# Altium PCB controller.PcbDoc
Units mm, origin at the board's own origin, x right, y up, seen from the top; angles counter-clockwise.
Board outline 75.64 x 99.01 mm, 2 copper layers (Top Layer, Bottom Layer); 70 components, 47 nets, 261 pads, 94 vias.
Unrouted connection lines stored in the file: 2.
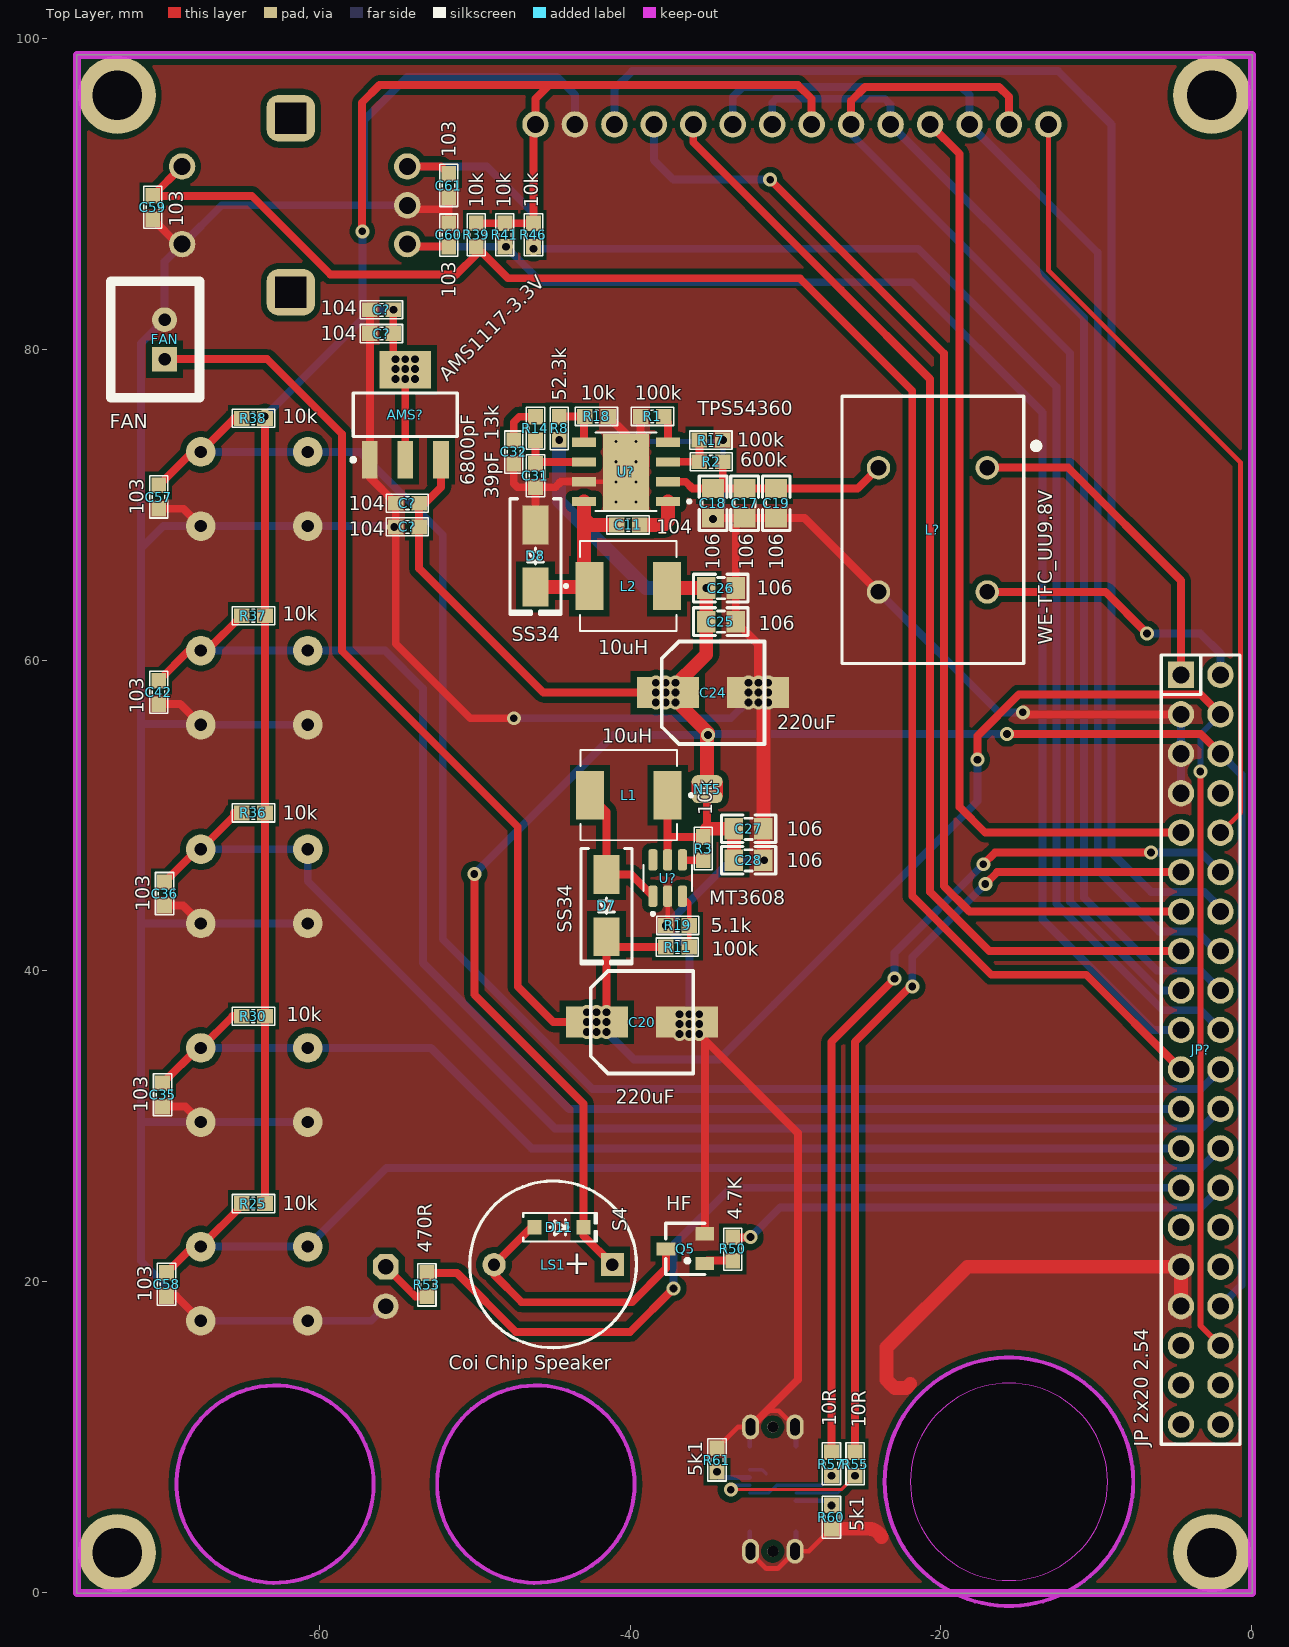
[diagram p0: Top Layer view]
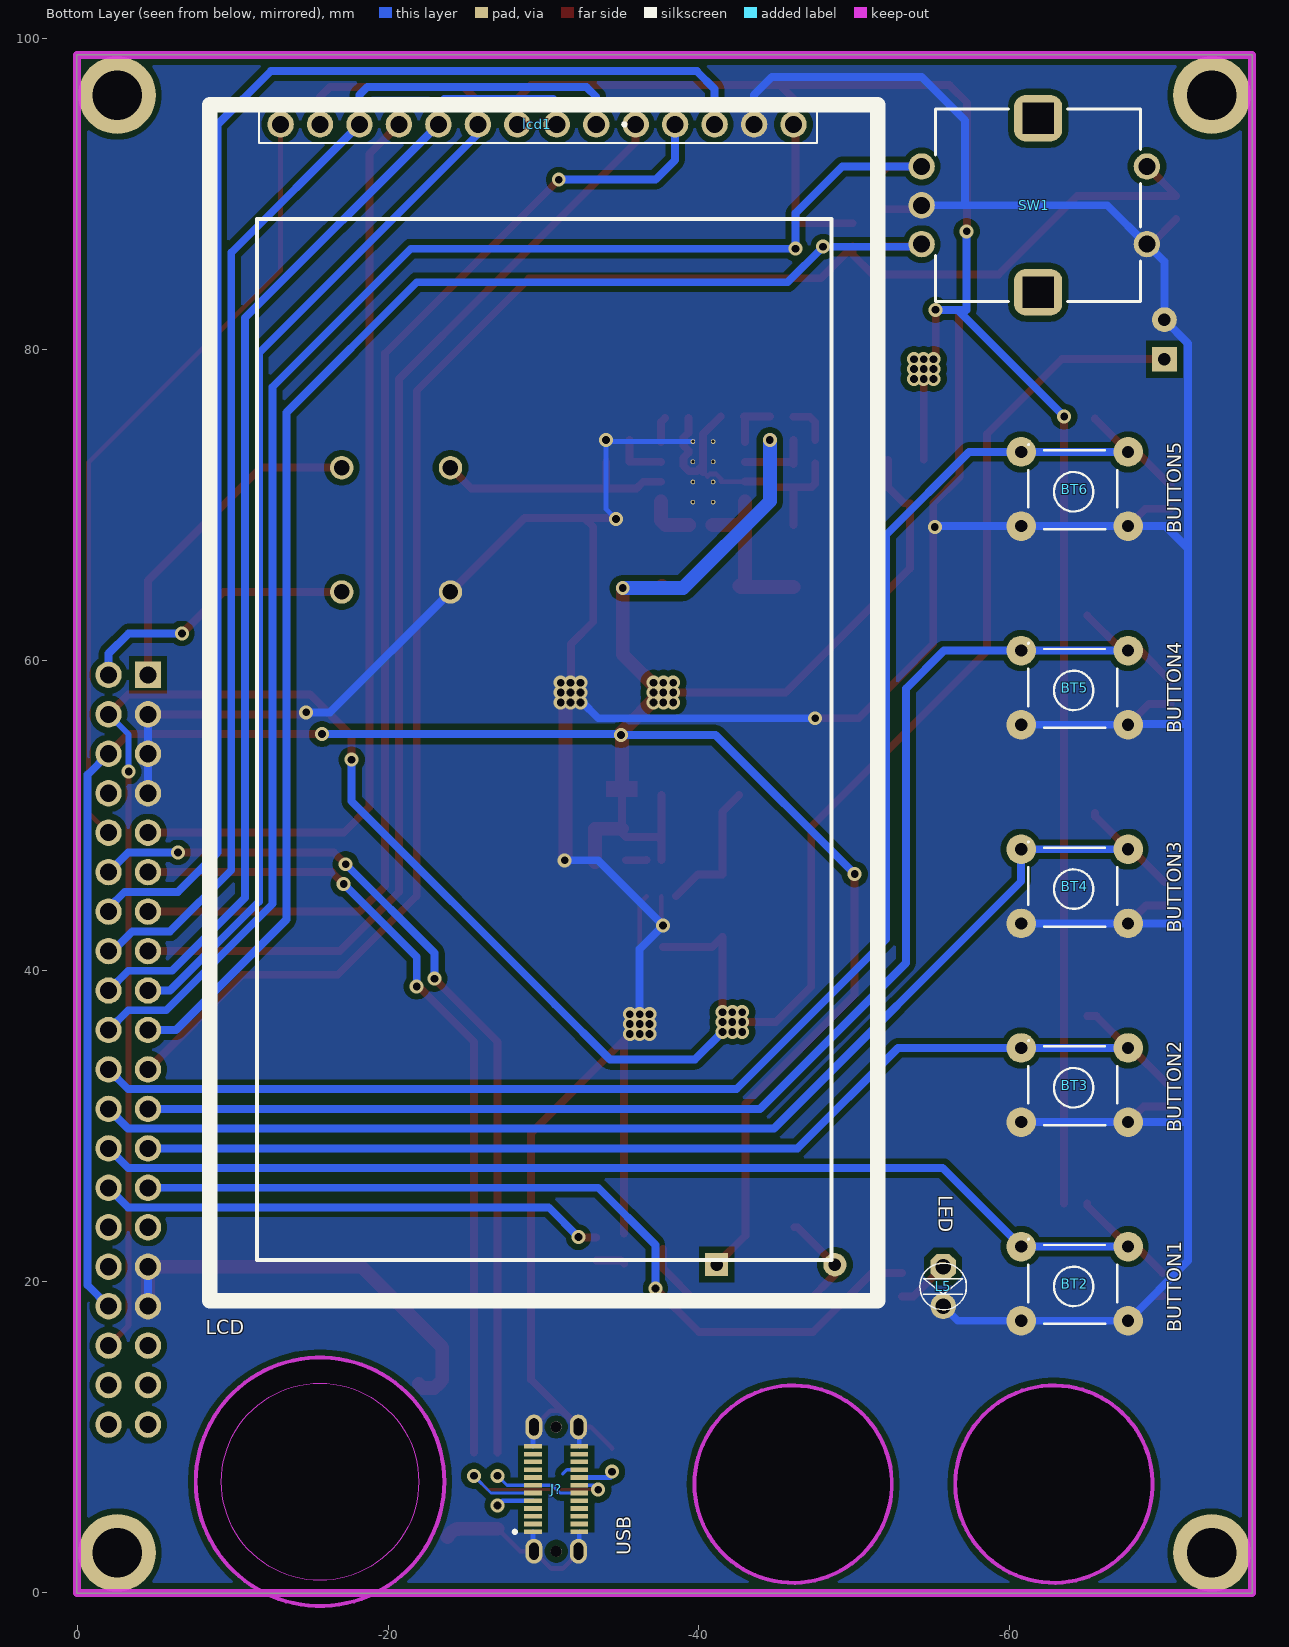
[diagram p1: Bottom Layer view, seen from below]
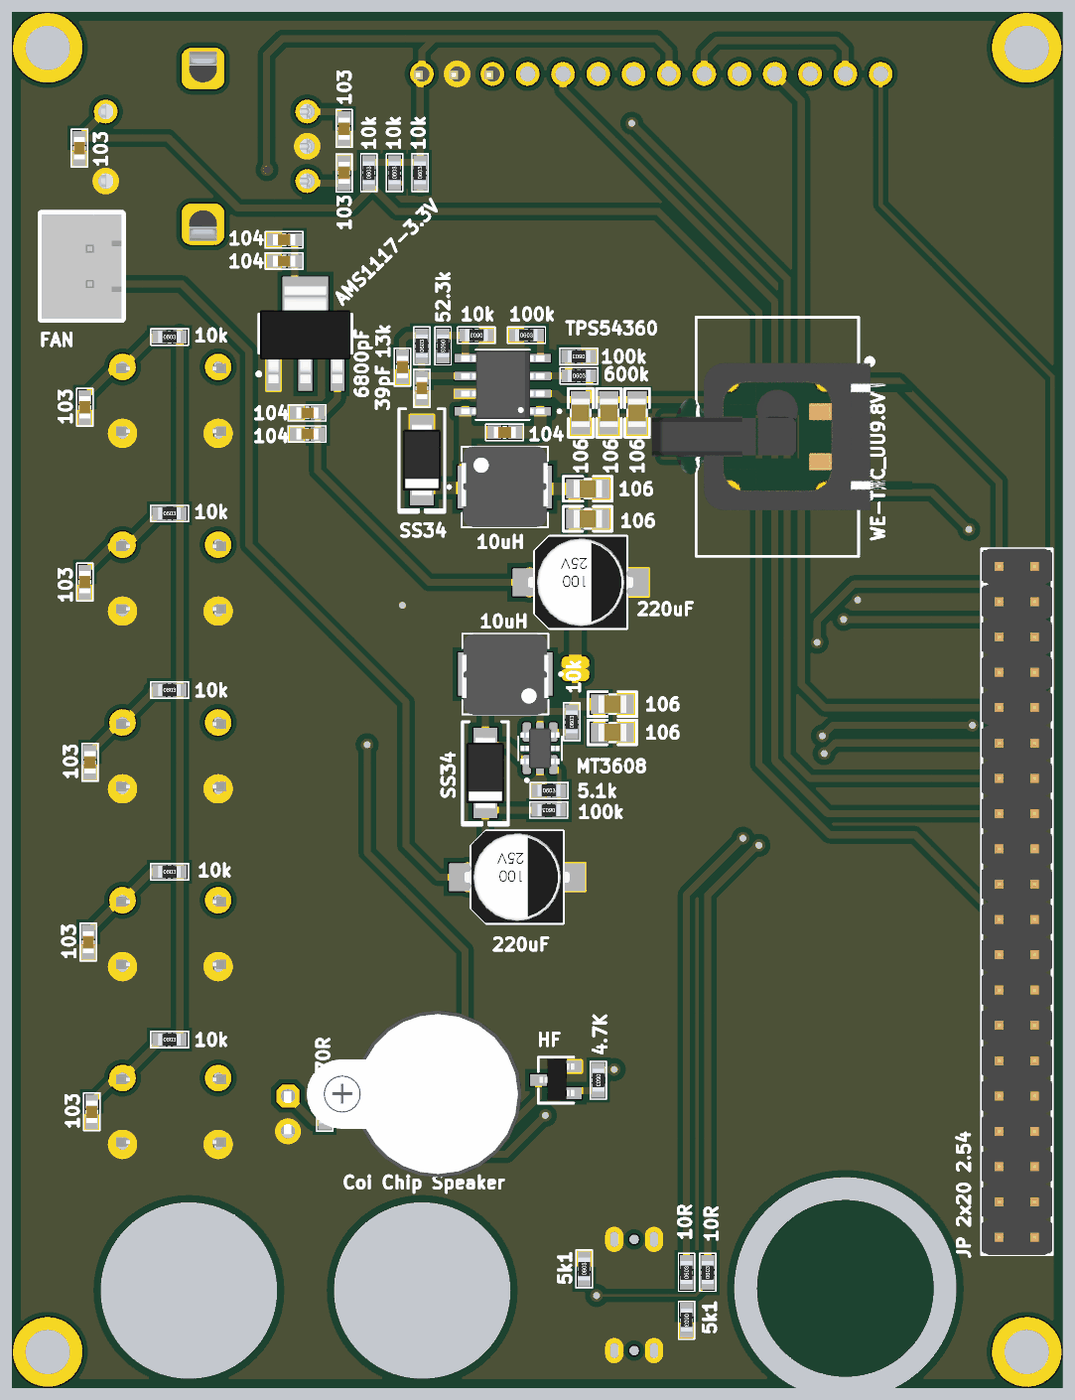
[diagram p2: 3D render of the assembled board from above, using the file's embedded part models]
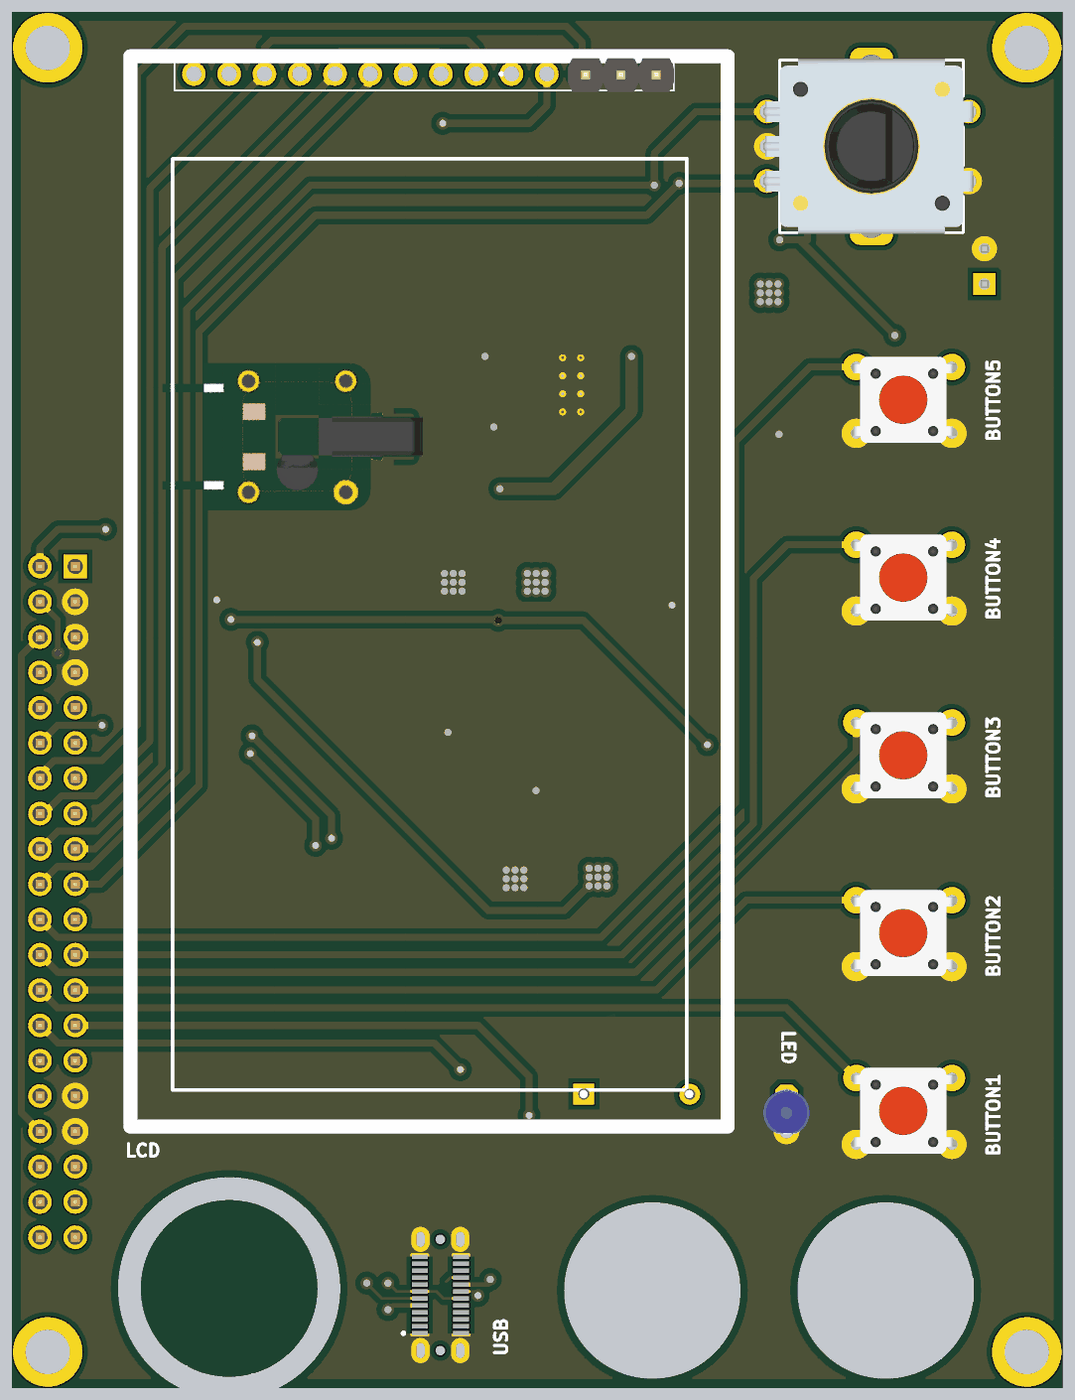
[diagram p3: 3D render of the assembled board from below, using the file's embedded part models]

## Layer stack, top to bottom
Top Solder: solder mask 0.0102, Solder Resist, Dk 3.5
Top Layer: signal copper 0.0356
Dielectric 1: dielectric 0.32, FR-4, Dk 4.8
Bottom Layer: signal copper 0.0356
Bottom Solder: solder mask 0.0102, Solder Resist, Dk 3.5

## Board outline
-75.616,-0.051 -75.616,98.958 0.025,98.958 0.025,-0.051
cut-out: -23.621,7.112 ccw(c-15.621,7.112) -15.621,-0.888 ccw(c-15.621,7.112) -7.621,7.112 ccw(c-15.621,7.112) -15.621,15.112 ccw(c-15.621,7.112)
cut-out: -21.973,7.112 ccw(c-15.621,7.112) -15.621,0.76 ccw(c-15.621,7.112) -9.269,7.112 ccw(c-15.621,7.112) -15.621,13.464 ccw(c-15.621,7.112)
cut-out: -52.427,6.96 ccw(c-46.076,6.96) -46.076,0.608 ccw(c-46.076,6.96) -39.724,6.96 ccw(c-46.076,6.96) -46.076,13.311 ccw(c-46.076,6.96)
cut-out: -69.217,6.96 ccw(c-62.865,6.96) -62.865,0.608 ccw(c-62.865,6.96) -56.513,6.96 ccw(c-62.865,6.96) -62.865,13.311 ccw(c-62.865,6.96)

## Design rules (kind name [scope] priority, off if disabled: settings)
Clearance [All] p1: gap=0.381 ignorepadtopadclearanceinfootprint=FALSE
PolygonConnect [All] p1: connectstyle=Direct reliefconductorwidth=0.254 reliefentries=4 polygonreliefangle="90 Angle" airgapwidth=0.254
RoutingVias [All] p1: holewidth=0.4 width=0.8 viastyle="Through Hole" minholewidth=0.4 minwidth=0.8 maxholewidth=0.4 maxwidth=0.8
SolderMaskExpansion [All] p1: expansion=0.102 istentingtop=FALSE
Width [All] p1: maxlimit=0.889 minlimit=0.203 preferedwidth=0.508
30 further rules are at their usual default settings.

## Components (designator, comment, footprint, x,y, rotation, side; value= is the part's Value field where it differs from the comment)
AMS? "AMS1117-3.3V" SOT223 -54.483,75.798 r0 top value="AMS1117-3.3V SOT223"
BT2 "BUTTON1" "Nut Nhan 4 Chan Cam 6x6" -67.31,17.272 r0 bottom
BT3 "BUTTON2" "Nut Nhan 4 Chan Cam 6x6" -67.31,30.061 r0 bottom
BT4 "BUTTON3" "Nut Nhan 4 Chan Cam 6x6" -67.31,42.85 r0 bottom
BT5 "BUTTON4" "Nut Nhan 4 Chan Cam 6x6" -67.31,55.639 r0 bottom
BT6 "BUTTON5" "Nut Nhan 4 Chan Cam 6x6" -67.31,68.428 r0 bottom
C11 "104" "tu 0603" -40.132,68.707 r180 top
C17 "106" "tu 0805" -32.639,70.104 r270 top
C18 "106" "tu 0805" -34.671,70.104 r270 top
C19 "106" "tu 0805" -30.607,70.104 r270 top
C20 "220uF" "tu nhom 6.3 (d)" -39.243,36.703 r0 top
C24 "220uF" "tu nhom 6.3 (d)" -34.671,57.912 r0 top
C25 "106" "tu 0805" -34.163,62.484 r0 top
C26 "106" "tu 0805" -34.163,64.643 r0 top
C27 "106" "tu 0805" -32.385,49.149 r0 top
C28 "106" "tu 0805" -32.385,47.117 r0 top
C31 "39pF" "tu 0603" -46.101,71.882 r270 top
C32 "6800pF" "tu 0603" -47.498,73.406 r270 top
C35 "103" "tu 0603" -70.104,32.016 r90 top
C36 "103" "tu 0603" -69.977,44.958 r90 top
C42 "103" "tu 0603" -70.358,57.924 r90 top
C57 "103" "tu 0603" -70.358,70.497 r90 top
C58 "103" "tu 0603" -69.85,19.812 r90 top
C59 "103" "tu 0603" -70.739,89.142 r90 top
C60 "103" "tu 0603" -51.689,87.376 r270 top
C61 "103" "tu 0603" -51.689,90.551 r90 top
C? "104" "tu 0603" -56.007,82.55 r180 top
C? "104" "tu 0603" -56.007,81.026 r180 top
C? "104" "tu 0603" -54.344,70.104 r180 top
C? "104" "tu 0603" -54.344,68.58 r180 top
D7 "SS34" "DIODE SMA" -41.529,44.196 r270 top
D8 "SS34" "DIODE SMA" -46.101,66.707 r270 top
D11 "S4" "DIODE SOD-123" -44.577,23.495 r0 top
FAN "FAN" XH2.54M-2 -69.977,79.375 r90 top (schematic designator H1)
J? "USB" GCT_USB4160-03-0230-C_REVA2 -30.822,6.64 r90 bottom
JP? "JP 2x20 2.54" "JP 2x20 DT" -3.277,34.925 r270 top locked
L1 "10uH" "CUON CAM SMD 0530" -40.092,51.308 r180 top
L2 "10uH" "CUON CAM SMD 0530" -40.132,64.77 r0 top
L5 "LED" LED-3MM-BLUE -55.736,19.558 r270 bottom
L? "WE-TFC_UU9.8V" WE-TFC_UU9.8V -20.518,68.39 r270 top
lcd1 "LCD" AMPHENOL_68001-103HLF -30.861,94.488 r0 bottom locked
LS1 "Coi Chip Speaker" "Coi Chip Speacker" -41.148,21.095 r180 top
NT5 "NetTie_2mm" NetTie_2mm -35.052,52.197 r270 top net-tie
Q5 "HF" SOT-23 -36.449,22.098 r90 top value=C9014
R1 "100k" "tro smd 0603" -38.579,75.692 r0 top
R2 "600k" "tro smd 0603" -34.798,72.771 r0 top
R3 "10k" "tro smd 0603" -35.306,47.867 r90 top
R8 "52.3k" "tro smd 0603" -44.577,74.93 r270 top
R11 "100k" "tro smd 0603" -36.957,41.529 r180 top
R14 "13k" "tro smd 0603" -46.101,74.918 r90 top
R17 "100k" "tro smd 0603" -34.798,74.168 r180 top
R18 "10k" "tro smd 0603" -42.164,75.692 r180 top
R19 "5.1k" "tro smd 0603" -36.957,42.926 r0 top
R25 "10k" "Tro smd 0603" -64.262,25.019 r0 top
R30 "10k" "Tro smd 0603" -64.262,37.084 r0 top
R36 "10k" "Tro smd 0603" -64.262,50.165 r0 top
R37 "10k" "Tro smd 0603" -64.262,62.865 r0 top
R38 "10k" "Tro smd 0603" -64.262,75.565 r0 top
R39 "10k" "Tro smd 0603" -49.911,87.376 r90 top
R41 "10k" "Tro smd 0603" -48.069,87.376 r90 top
R46 "10k" "Tro smd 0603" -46.228,87.376 r90 top
R50 "4.7K" "Tro smd 0603" -33.401,22.098 r270 top
R53 "470R" "Tro smd 0603" -53.086,19.8 r270 top
R55 "10R" "Tro smd 0603" -25.527,8.255 r90 top
R57 "10R" "Tro smd 0603" -27.051,8.255 r90 top
R60 "5k1" "tro smd 0603" -27.051,4.838 r270 top
R61 "5k1" "tro smd 0603" -34.417,8.509 r90 top
SW1 "482024764004" 482024764004 -61.849,89.281 r0 bottom
U? "TPS54360" VREG_LM5017MR/NOPB -40.274,72.121 r180 top
U? "MT3608" SOT95P280X145-6N -37.592,45.974 r90 top

## Footprints (in the part's own frame and the unit in brackets; to place one, negate y for a bottom-side part, rotate by r counter-clockwise, add the part's x,y. Pads: shape width x height; smd on the part's side, far side on the other; paste and mask are expansions set on the pad)
482024764004 [mm]
  round 1.7 hole 1.1: 1(-7,-2.5) 2(-7,2.5) A(7.5,-2.5) B(7.5,2.5) C(7.5,0)
  rrect50% 3.1x3 hole 2 square: S1(0,5.6) S2(0,-5.6)
  silkscreen extent -6.6,-6.2 6.6,6.2, body extent -7.32,-6.81 7.8,6.81, height 20.1
AMPHENOL_68001-103HLF [mm]
  round 1.7 hole 1.1: 1(-15.24,0) 2(-12.7,0) 3(-10.16,0) 4(-7.62,0) 5(-5.08,0) 6(-2.54,0) 7(0,0) 8(2.54,0) 9(5.08,0) 10(7.62,0) 11(10.16,0) 12(12.7,0) 13(15.24,0) 14(17.78,0)
  silkscreen extent -20.65,-1.27 22.35,75.73, body extent -16.76,-1.14 -9.14,1.27, height 8.38
"Coi Chip Speacker" [mm]
  rect 1.5x1.5 hole 0.8: 1(0,0)
  round 1.5 hole 0.8: 2(7.62,0.013)
  silkscreen extent -1.55,-5.38 9.18,5.36, body extent -2.22,-6 13.24,6, height 4.5
"CUON CAM SMD 0530" [mm] "CUON CAM SMD 0530"
  rect 1.8x3.1 smd: 1(-2.5,0) 2(2.5,0)
  silkscreen extent -4.1,-2.9 3.1,2.9, body extent -3.1,-2.88 3.1,2.92, height 3
"DIODE SMA" [mm] "SMA"
  rect 2.5x1.7 smd: 1(-2,0) 2(2,0)
  silkscreen extent -3.68,-1.65 3.75,1.65, body extent -2.6,-1.37 2.6,1.37, height 2.4
"DIODE SOD-123" [mm] "SOD-123"
  rect 0.9x0.95 smd: 1(-1.575,0) 2(1.575,0)
  silkscreen extent -2.3,-0.92 2.41,0.92, body extent -1.86,-0.78 1.86,0.77, height 1.35
GCT_USB4160-03-0230-C_REVA2 [mm]
  rect 0.3x1.15 smd: A1(-2.75,1.485) A2(-2.25,1.485) A3(-1.75,1.485) A4(-1.25,1.485) A5(-0.75,1.485) A6(-0.25,1.485) A7(0.25,1.485) A8(0.75,1.485) A9(1.25,1.485) A10(1.75,1.485) A11(2.25,1.485) A12(2.75,1.485) B1(2.75,-1.485) B2(2.25,-1.485) B3(1.75,-1.485) B4(1.25,-1.485) B5(0.75,-1.485) B6(0.25,-1.485) B7(-0.25,-1.485) B8(-0.75,-1.485) B9(-1.25,-1.485) B10(-1.75,-1.485) B11(-2.25,-1.485) B12(-2.75,-1.485)
  oval 1.6x1.1 hole 0.6 slot 1.1 at 0 deg: S1(-4,1.43) S2(4,1.43) S3(-4,-1.43) S4(4,-1.43)
  round 0.71 hole 0.71 unplated: ""(-4,0) ""(4,0)
  silkscreen extent -2.85,2.56 -2.65,2.76
"JP 2x20 DT" [mm] "40 pins, dual pin, straight, gold plating"
  rect 1.7x1.7 hole 1.1: 1(-24.13,-1.27)
  round 1.7 hole 1.1: 2(-21.59,-1.27) 3(-19.05,-1.27) 4(-16.51,-1.27) 5(-13.97,-1.27) 6(-11.43,-1.27) 7(-8.89,-1.27) 8(-6.35,-1.27) 9(-3.81,-1.27) 10(-1.27,-1.27) 11(1.27,-1.27) 12(3.81,-1.27) 13(6.35,-1.27) 14(8.89,-1.27) 15(11.43,-1.27) 16(13.97,-1.27) 17(16.51,-1.27) 18(19.05,-1.27) 19(21.59,-1.27) 20(24.13,-1.27) 21(24.13,1.27) 22(21.59,1.27) 23(19.05,1.27) 24(16.51,1.27) 25(13.97,1.27) 26(11.43,1.27) 27(8.89,1.27) 28(6.35,1.27) 29(3.81,1.27) 30(1.27,1.27) 31(-1.27,1.27) 32(-3.81,1.27) 33(-6.35,1.27) 34(-8.89,1.27) 35(-11.43,1.27) 36(-13.97,1.27) 37(-16.51,1.27) 38(-19.05,1.27) 39(-21.59,1.27) 40(-24.13,1.27)
  silkscreen extent -25.4,-2.54 25.4,2.54, body extent -25.4,-2.54 25.4,2.54, height 8.55
LED-3MM-BLUE [mil]
  oct 65x65 hole 40: 1(-55,0)
  round 65 hole 40: 2(45,0)
  silkscreen extent -64,-59 54,59, body extent -72,-65 54,65, height 184
NetTie_2mm [mm]
  oval 0.8x2 smd paste-2 mask+0.102: 1(0,0) 2(1,0)
  Top Layer region: 0,1 1,1 1,-1 0,-1
"Nut Nhan 4 Chan Cam 6x6" [mil] "SW button 4pin, 250 x250 mil"
  round 75 hole 31: 1(-13,-8) 1(258,-8) 2(-13,-196) 2(258,-196)
  silkscreen extent 15,-215 240,0, body extent -31,-225 281,19, height 276
SOT95P280X145-6N [mm]
  rrect50% 1.37x0.59 smd: 1(-1.17,0.95) 2(-1.17,0) 3(-1.17,-0.95) 4(1.17,-0.95) 5(1.17,0) 6(1.17,0.95)
  silkscreen extent -2.4,-1.57 0.85,1.57, body extent -1.45,-1.4 1.45,1.4, height 1.45
SOT223 [mm]
  rect 1x2.4 smd: 1(-2.3,-2.9) 2(0,-2.9) 3(2.3,-2.9)
  rect 3.3x2.4 smd: 4(0,2.9)
  silkscreen extent -3.47,-3.02 3.35,1.4, body extent -3.25,-3.56 3.25,3.4, height 1.68
SOT-23 [mm] "SOT 23 _ 1-3-2"
  rect 0.85x1.2 smd: 1(-0.94,-1.245) 2(0.985,-1.25) 3(0.005,1.25)
  silkscreen extent -1.65,-1.27 1.65,1.27, body extent -1.47,-1.33 1.53,1.17, height 1.06
"tro smd 0603" [mm] "Chip Capacitor, 2-Leads, Body 1,60x0,80mm, IPC Medium Density"
  rect 1x0.95 smd mask+0.076: 1(-0.75,0) 2(0.75,0)
  silkscreen extent -1.35,-0.58 1.37,0.58, body extent -0.82,-0.42 0.82,0.43, height 0.44
"Tro smd 0603" [mm] "Chip Capacitor, 2-Leads, Body 1,60x0,80mm, IPC Medium Density"
  rect 1x0.95 smd mask+0.076: 1(-0.75,0) 2(0.75,0)
  silkscreen extent -1.35,-0.58 1.37,0.58, body extent -0.82,-0.42 0.82,0.43, height 0.44
"tu 0603" [mm] "Chip Capacitor, 2-Leads, Body 1,60x0,80mm, IPC Medium Density"
  rect 1x0.95 smd mask+0.076: 1(-0.75,0) 2(0.75,0)
  silkscreen extent -1.35,-0.58 1.37,0.58, body extent -0.8,-0.4 0.8,0.4, height 0.9
"tu 0805" [mm] "Compoment SMD 80x50mil"
  rect 1.2x1.4 smd: 1(-0.946,-0.003) 2(0.954,-0.003)
  silkscreen extent -1.75,-0.89 1.75,0.89, body extent -1.01,-0.64 1.01,0.63, height 0.61
"tu nhom 6.3 (d)" [mm]
  rect 4x2 smd: 1(-2.9,0) 2(2.9,0)
  silkscreen extent -3.3,-3.3 3.3,3.3, body extent -3.8,-3.3 3.8,3.3, height 8
VREG_LM5017MR/NOPB [mm]
  rrect5% 1.55x0.6 smd mask+0: 1(-2.7,1.905) 2(-2.7,0.635) 3(-2.7,-0.635) 4(-2.7,-1.905) 5(2.7,-1.905) 6(2.7,-0.635) 7(2.7,0.635) 8(2.7,1.905)
  rect 2.95x4.9 smd paste-3 mask+0: 9(0,0)
  round 0.3 hole 0.2: 10(-0.65,1.95) 11(0.65,1.95) 12(-0.65,0.65) 13(0.65,0.65) 14(-0.65,-0.65) 15(0.65,-0.65) 16(-0.65,-1.95) 17(0.65,-1.95)
  silkscreen extent -4.17,-2.52 1.95,2.52, body extent -3,-2.45 3,2.45, height 1.7
WE-TFC_UU9.8V [mm]
  round 1.508 hole 1: 1(-4,3.5) 2(4,3.5) 3(4,-3.5) 4(-4,-3.5)
  silkscreen extent -8.6,-5.85 8.6,6.85, body extent -5.3,-9.05 5.3,9.7, height 7.85
XH2.54M-2 [mm]
  rect 1.6x1.6 hole 0.8: 1(0,0)
  round 1.6 hole 0.8: 2(2.54,0)
  silkscreen extent -2.48,-2.26 5.02,3.46, body extent -2.48,-2.26 5.02,3.48, height 6.91

## Part data
AMS?: library part "AMS1117 SMD", "Dán", Chung_Loai=Dán, Don_Vi=Con, Ma_Hang=MH000596
BT2 BT3 BT4 BT5 BT6: library part "Nut Nhan 4 Chan Cam 6x6", "Nut Nhan 4 Chan 6x6mm", Ma_Hang=MH004584, Ten="Nút Nhấn 4 Chân 6x6x5MM DIP"
C11: library part "Tu 0603 104 50V 10%", "Dán", Chung_Loai=Dán, Don_Vi=Con, Ma_Hang=MH004568, So_Chan=2, Ten_Linh_Kien="Tụ 0603 104-100nF 10% 50V"
C17 C18 C19 C25 C26 C27 C28: library part "Tu 0805 106 16V 10%", "Dán", Chung_Loai=Dán, Don_Vi=Con, Ma_Hang=MH004553, So_Chan=2, Ten_Linh_Kien="Tụ 0805 106-10uF 10% 16V"
C20 C24: library part "Tu Nhom 220uF 16V", "Dán", Chung_Loai=Dán, Don_Vi=Con, Ma_Hang=MH002227, So_Chan=2, Ten_Linh_Kien="Tụ Nhôm 220uF 16V 6.3x7.7MM"
C31 C32 C35 C36 C42 C57 C58 C59 C60 C61: library part "Tu 0603 106 16V 20%", "Dán", Chung_Loai=Dán, Don_Vi=Con, Ma_Hang=MH004848, So_Chan=2, Ten_Linh_Kien="Tụ 0603-10uF 20% 16V"
C? C? C? C?: library part "Tu 0603 101 50V 10%", "Dán", Chung_Loai=Dán, Don_Vi=Con, Ma_Hang=MH004565, So_Chan=2, Ten_Linh_Kien="Tụ 0603 101-0.1nF 10% 50V"
D7 D8: library part "Diode SS34 ( 1N5822 )", "Dán", Chung_Loai=Dán, Don_Vi=Con, Ma_Hang=MH002104, Ten_Linh_Kien="Diode SS34 3A 40V SMA ( 1N5822 SS34A)"
D11: library part "Diode S4", "Dán", Chung_Loai=Dán, Don_Vi=Con, Ma_Hang=MH005519, Ten_Linh_Kien="Diode S4 SOD123 ( 1N5819 SOD123)"
FAN: library part "Header 2P 2.54 Duc Thang", "Cắm", Chung_Loai=Cắm, Don_Vi=Con, Ma_Hang=MH001283, Ten_Linh_Kien="Header 2P XH2.54-2P Đực Thẳng"
J?: library part USB4160-03-0230-C_REVA2, Package=None, Availability=Unavailable, MP=USB4160-03-0230-C_REVA2, Price=None
JP?: library part "JP 2x20 2.54 Duc Thang", "Cắm", Chung_Loai=Cắm, Don_Vi=Con, Ma_Hang=MH002686, Ten_Linh_Kien="Jump Đôi Đực 2.54MM 2x40P Thẳng 11MM"
L1 L2: library part "Cuon Cam SMD 0530", "SMD 0530", Package=None, Availability=Unavailable, MP=FDV0530-H-1R5M=P3, Price=None
L5: library part "LED 3mm Xanh Duong", "Cắm", Chung_Loai=Cắm, Don_Vi=Con, Ma_Hang=MH009003, Ten_Linh_Kien="LED 3MM Xanh Dương SS (1000c)"
L?: "Size Typ UU; L = 25 mH; IR = 0.25 A; RDC = 3.6 â„", Package="Vertical-4 Wurth Electronics", Check_prices=https://www.snapeda.com/parts/744862250/Wurth+Electronics/view-part/?ref=eda, MF="Wurth Electronics", MP=744862250, SnapEDA_Link=https://www.snapeda.com/parts/744862250/Wurth+Electronics/view-part/?ref=snap
lcd1: library part 68001-103HLF, "Conn Rect UnshroudedHdr 3Cnts ThruHole BergStik 2.54mmPin-Spng Vert 1-Row", Package=None, Check_prices=https://www.snapeda.com/parts/68001-103HLF/Amphenol/view-part/?ref=eda, MF=Amphenol, MP=68001-103HLF, SnapEDA_Link=https://www.snapeda.com/parts/68001-103HLF/Amphenol/view-part/?ref=snap
LS1: "Còi chip"
Q5: library part "Trans C1815 HF SMD", "SOT-23"
R1 R2 R3 R8 R11 R14 R17 R18 R19: library part "Tro 0603 1% 0R", "Dán", Chung_Loai=Dán, Don_Vi=Con, Ma_Hang=MH005792, So_Chan=2, Ten_Linh_Kien="Trở 0603 1% 0R"
R25 R30 R36 R37 R38 R39 R41 R46 R50 R53 R55 R57: library part "Tro 0603 5% 10R", "Dán", Chung_Loai=Dán, Don_Vi=Con, Ma_Hang=MH006317, So_Chan=2, Ten_Linh_Kien="Trở 0603 5% 10R"
R60 R61: library part "Tro 0603 5% 51k", "Dán", Chung_Loai=Dán, Don_Vi=Con, Ma_Hang=MH007666, So_Chan=2, Ten_Linh_Kien="Trở 0603 5% 51k"
SW1: "WS-ENTV Mechanical Incremental Encoder Switch, Plastic Shaft without bushing, 24Pulse/360°, 24positi", Insulation Resistance=100MΩ, Manufacturer="Wurth Elektronik", Operating Temperature Max=85°C, Operating Temperature Min=-40°C, Rated Current=10mA, Category="Encoder Switches", ComponentLink1Description="Website Link", ComponentLink1URL=https://www.we-online.com/redexpert/article/482024764004?ad, ComponentLink2Description="Datasheet Link", ComponentLink2URL=https://www.we-online.com/redexpert/spec/482024764004?ad, Detent=24positions, Electrical Life Encoder=30000Cycles, Electrical Life Switch=20000Cycles, Height=20mm, Length=13.2mm, Manufacturer Part Number=482024764004, Match Code=WS-ENTV, Mount="Through Hole", Operation Force=300g, Packaging=Tray, Resolution=24Pulse/360°, Width=12.4mm
U?: library part TPS54360BQDDAQ1, "Automotive, 60V Input, 3.5A, Step-Down DC-DC Converter With Eco-mode&trade; 8-SO PowerPAD -40 to 125", Package="HSOIC-8 Texas Instruments", Availability=Bad, Check_prices=https://www.snapeda.com/parts/TPS54360BQDDAQ1/Texas%20Instruments/view-part/1129741/?ref=eda, MF="Texas Instruments", MP=TPS54360BQDDAQ1, Price=None, Purchase-URL=https://pricing.snapeda.com/search/part/TPS54360BQDDAQ1/?ref=eda, SnapEDA_Link=https://www.snapeda.com/parts/TPS54360BQDDAQ1/Texas%20Instruments/view-part/1129741/?ref=snap
U?: "High Efficiency 1.2MHz2A Step Up Converter", Package=Package, Availability="Not in stock", Check_prices=https://www.snapeda.com/parts/MT3608/Aerosemi+Technology+Co.%252C+Ltd/view-part/?ref=eda, MF="Aerosemi Technology Co., Ltd", MP=MT3608, Price=None, SnapEDA_Link=https://www.snapeda.com/parts/MT3608/Aerosemi+Technology+Co.%252C+Ltd/view-part/?ref=snap

## Free pads (board coordinates)
  round 5 hole 3.2: 12(-73.025,2.54) 12(-73.025,96.368) 12(-2.565,2.54) 12(-2.565,96.368)

## Via types
v1: diameter 0.9, hole 0.5, Top Layer to Bottom Layer, tented both sides, 94 vias

## Nets (pads, with @x,y where several pads share a name; then routed paths per layer and width w, separated by ;. In a path a pad name is that pad's centre, name@x,y a point inside that pad or via, vN(x,y) a via of type N, cw(c..) or ccw(c..) an arc to the next point about the centre after c; other vN are vias at no path point)
+5: AMS?.3 C24.1 C25.1 C26.1 C?.1@-53.594,68.58 C?.1@-53.594,70.104 D11.2 JP?.24 JP?.38 L2.2 LS1.1 NT5.1 R8.2 | length 177.9
  Top Layer w0.508: AMS?.3 -52.183,71.134 -53.213,70.104 -53.594,70.104 -53.594,68.58 -53.594,65.913 -45.593,57.912 C24.1 ; v1(-50.038,46.228) -50.038,38.481 -43.002,31.445 D11.2 -43.002,22.949 LS1.1 ; v1(-15.748,55.245) -3.277,55.245 JP?.38
  Top Layer w0.889: L2.2 -37.502,64.64 v1(-35.109,64.64) C25.1 -35.109,60.374 C24.1 -34.989,55.33 v1(-34.989,55.181) -35.052,55.118 NT5.1
  Bottom Layer w0.508: v1(-50.038,46.228) -41.084,55.181 v1(-34.989,55.181) -34.925,55.245 v1(-15.748,55.245) ; v1@-37.846,57.912 v1@-37.74,57.912 ; JP?.24 -0.66,19.761 -0.66,52.629 JP?.38
  Bottom Layer w0.889: v1(-44.577,74.168) -44.577,70.231 -38.986,64.64 v1(-35.109,64.64)
  other v1: -38.354,57.277 -37.719,57.277 -37.084,57.277 -37.084,57.277 -38.354,57.912 -37.719,57.912 -37.084,57.912 -37.084,57.912 -38.354,58.547 -37.719,58.547 -37.084,58.547 -37.084,58.547
+12: C20.1 D7.2 FAN.1 JP?.23 JP?.39 R11.2 | length 164.9
  Top Layer w0.381: v1(-3.302,52.832) -3.302,17.17 JP?.23
  Top Layer w0.508: FAN.1 -63.373,79.375 -58.547,74.549 -58.547,60.579 -47.244,49.276 -47.244,38.989 -44.958,36.703 C20.1 ; C20.1@-41.963,36.883 -41.529,37.317 D7.2 -40.862,41.529 R11.2 ; v1(-17.653,53.594) -17.653,55.118 -14.986,57.785 -3.277,57.785 JP?.39
  Bottom Layer w0.381: v1(-3.302,52.832) -3.302,55.22 JP?.39
  Bottom Layer w0.508: v1@-42.291,36.703 v1@-42.185,36.703 ; v1@-41.783,36.703 v1@-41.656,36.576 ; v1(-41.529,36.703) v1(-41.529,36.068) -39.751,34.29 -34.29,34.29 -30.734,37.846 -17.653,50.927 v1(-17.653,53.594)
  other v1: -42.799,36.068 -42.164,36.068 -41.529,36.068 -42.799,36.703 -42.164,36.703 -41.529,36.703 -42.799,37.338 -42.164,37.338 -41.529,37.338 -41.529,37.338
BT1: BT2.2 C58.2 JP?.28 R25.1 | length 75
  Top Layer w0.508: C58.2 -68.162,22.25 -67.64,22.25 -65.012,24.879 R25.1
  Bottom Layer w0.508: BT2.2@-67.64,22.25 -60.757,22.25 -55.702,27.305 -3.277,27.305 JP?.28
BT2: BT3.2 C35.2 JP?.13 R30.1 | length 72.7
  Top Layer w0.508: C35.2 -67.831,35.039 -67.64,35.039 -65.595,37.084 R30.1
  Bottom Layer w0.508: BT3.2@-67.64,35.039 -60.757,35.039 -52.819,35.039 -46.355,28.575 JP?.13
BT3: BT4.2 C36.2 JP?.29 R36.1 | length 81.2
  Top Layer w0.508: C36.2 -67.857,47.828 -67.64,47.828 -65.52,49.948 -65.52,50.165
  Bottom Layer w0.508: BT4.2@-67.64,47.828 -60.757,47.828 -60.757,45.771 -44.844,29.858 -5.067,29.858 -3.264,29.858 JP?.29
BT4: BT5.2 C42.2 JP?.12 R37.1 | length 92.7
  Top Layer w0.508: C42.2 -68.415,60.617 -67.64,60.617 -67.26,60.617 R37.1
  Bottom Layer w0.508: BT5.2@-67.64,60.617 -60.757,60.617 -55.791,60.617 -53.34,58.166 -53.34,40.513 -43.942,31.115 JP?.12
BT5: BT6.2 C57.2 JP?.30 R38.1 | length 105.1
  Top Layer w0.508: C57.2 -68.199,73.406 -67.64,73.406 -65.52,75.526 -65.52,75.565
  Bottom Layer w0.508: BT6.2@-67.64,73.406 -60.757,73.406 -57.404,73.406 -52.07,68.072 -52.07,42.037 -42.418,32.385 -3.277,32.385 JP?.30
buzzer: JP?.27 R50.1 | length 32.7
  Top Layer w0.508: R50.1 -32.27,22.848 v1(-32.258,22.86)
  Bottom Layer w0.508: v1(-32.258,22.86) -30.34,24.778 -5.067,24.778 -3.264,24.778 JP?.27
CS: JP?.34 lcd1.3 | length 91.8
  Bottom Layer w0.508: lcd1.3 -41.021,96.774 -39.878,97.917 -12.446,97.917 -9.017,94.488 -9.017,47.625 -6.477,45.085 -3.048,45.085 -2.007,44.044 JP?.34
data+: J?.A6 J?.B6 R55.1 | length 14
  Top Layer w0.203: v1(-33.528,6.604) -26.416,6.604 v1(-25.527,7.493)
  Bottom Layer w0.203: v1(-33.528,6.604) -33.242,6.89 J?.B6 ; J?.A6 -26.63,6.39 v1(-25.527,7.493)
data-: J?.A7 J?.B7 R57.1 | length 5.7
  Bottom Layer w0.203: J?.B7 -31.075,6.39 -30.575,6.89 J?.A7 -27.654,6.89 v1(-27.051,7.493)
DC: JP?.8 lcd1.5 | length 73.4
  Top Layer w0.508: lcd1.5 -35.941,93.345 -26.416,83.82 -20.701,78.105 -20.701,45.085 -16.891,41.275 JP?.8
EN: R2.1 R17.2 U?.3@-37.574,72.756 | length 3.4
  Top Layer w0.508: U?.3@-37.574,72.756 -37.559,72.771 R2.1 R17.2
enc_a: C60.2 JP?.10 R41.1 SW1.B | length 92.7
  Top Layer w0.508: SW1.B -54.194,86.626 C60.2 ; R41.1 -48.018,86.626 v1(-48.006,86.614)
  Bottom Layer w0.508: SW1.B -54.182,86.614 v1(-48.006,86.614) -45.72,84.328 -21.844,84.328 -13.462,75.946 -13.462,43.307 -6.35,36.195 JP?.10
enc_b: C61.2 JP?.31 R46.1 SW1.A | length 99.2
  Top Layer w0.508: SW1.A -52.169,91.781 C61.2 ; v1(-46.228,86.487) R46.1
  Bottom Layer w0.508: SW1.A -49.236,91.781 -46.228,88.773 v1(-46.228,86.487) -21.463,86.487 -12.573,77.597 -12.573,44.323 -5.715,37.465 -3.277,37.465 JP?.31
enc_c: C59.2 JP?.11 R39.1 SW1.1 | length 113
  Top Layer w0.508: SW1.1 C59.2 -64.365,89.892 -59.309,84.836 -51.181,84.836 -49.911,86.106 R39.1 -47.867,84.582 -29.083,84.582 -21.844,77.343 -21.844,44.831 -16.764,39.751 -10.643,39.751 JP?.11
FB: R8.1 R18.2 U?.5@-42.974,74.026 | length 3.3
  Top Layer w0.508: R8.1 R18.2@-42.926,75.68 ; U?.5@-42.974,74.026 -42.974,75.632 R18.2@-42.926,75.68 ; R18.2 R18.2@-42.926,75.68
GND: AMS?.1 BT2.1 BT3.1 BT4.1 BT5.1 BT6.1 C17.2 C18.2 C19.2 C20.2 C24.2 C25.2 C26.2 C27.2 C28.2 C31.2 C32.2 C35.1 C36.1 C42.1 C57.1 C58.1 C59.1 C60.1 C61.1 C?.2 D8.1 FAN.2 J?.A1 J?.A12 J?.B1 J?.B12 J?.S1 J?.S2 J?.S3 J?.S4 JP?.2 JP?.3 JP?.4 JP?.16 JP?.17 L5.2 L?.3 lcd1.2 Q5.2 R1.1 R17.1 R18.1 R19.1 R60.2 R61.2 SW1.2 SW1.C U?.2@-37.592,44.804 U?.7 U?.9 U?.10 U?.11 U?.12 U?.13 U?.14 U?.15 U?.16 U?.17 | length 447.4
  Top Layer w0.305: U?.7 -41.43,71.486 -41.43,71.68 -41.133,71.977 -40.715,71.977 -40.566,71.829 U?.9 ; v1(-37.707,42.926) -37.592,43.041 U?.2@-37.592,44.804 ; R61.2 -33.036,10.64 J?.S4 ; R17.1 v1(-34.036,74.168) ; J?.S3 -32.252,2.534 -31.242,1.524 -30.508,1.524 J?.S1 -28.499,2.64 R60.2 ; -31.208,11.684 -30.436,11.684 J?.S2
  Top Layer w0.508: C59.1 -69.128,86.781 SW1.2 ; C42.1 -68.972,57.174 BT5.1@-67.64,55.842 ; C57.1 -68.756,69.747 BT6.1@-67.64,68.631 ; C35.1 -68.642,31.266 BT3.1@-67.64,30.264 ; C36.1 -68.795,44.208 BT4.1@-67.64,43.053 ; C58.1 -69.227,19.062 BT2.1@-67.64,17.475 ; C?.2@-56.757,82.55 -56.757,81.026 -56.757,72.924 AMS?.1 -56.783,71.793 -55.094,70.104 C?.2@-55.094,68.58 ; C?.2@-55.094,68.567 -55.094,61.063 -50.292,56.261 v1(-47.498,56.261) ; SW1.C -54.095,89.027 -51.689,89.027 ; C60.1 -51.689,89.027 ; C61.1 -51.689,89.027 ; C32.2 -47.498,71.374 -47.256,71.132 C31.2 ; D8.1 C31.2 ; U?.7 -42.989,71.501 -44.45,71.501 -44.819,71.132 C31.2 ; R18.1 -40.274,74.552 U?.9 -40.053,72.342 -39.876,72.164 -39.372,72.164 -39.017,72.519 -39.017,73.023 -39.329,73.335 -39.329,73.507 -39.017,73.819 -39.017,74.323 -39.329,74.635 R1.1@-39.329,75.577 ; C20.2 -35.199,35.559 ; Q5.2 -35.199,35.559 ; C18.2@-34.671,69.15 C17.2 ; J?.S4 -31.208,11.684 -29.21,13.682 -29.21,29.57 -35.199,35.559 ; C24.2 -31.771,61.043 C25.2 C26.2 -33.209,68.583 C17.2 ; L?.3 -28.778,69.15 C19.2 C17.2 ; v1(-14.732,56.642) -14.605,56.515 JP?.2
  Top Layer w0.889: C24.2 -31.431,57.572 C27.2 C28.2@-31.431,47.117 ; R60.2 -24.651,4.088 cw(c-24.651,3.199) -23.836,3.554 ; -21.978,13.416 -22.238,13.156 -22.606,13.156 -22.974,13.156 -23.235,13.416 -23.495,13.677 -23.495,15.748 -18.288,20.955 JP?.16 JP?.17
  Bottom Layer w0.305: U?.16 -34.133,74.071 v1(-34.036,74.168) -34.036,69.723 v1(-34.671,69.088) ; J?.B12 -32.307,2.695 J?.S3 ; J?.B1 -32.307,10.585 J?.S4 ; J?.S1 -29.337,2.695 J?.A1 ; J?.S2 -29.337,10.585 J?.A12
  Bottom Layer w0.508: BT3.1@-60.757,30.264 -67.64,30.264 -71.412,30.264 -71.501,30.353 ; BT4.1@-60.757,43.053 -67.64,43.053 -71.374,43.053 -71.501,42.926 ; BT5.1@-60.757,55.842 -67.64,55.842 -67.678,55.88 -71.501,55.88 ; L5.2 -56.676,17.475 -60.757,17.475 -67.64,17.475 -71.501,21.336 -71.501,30.353 ; v1(-55.194,68.567) -55.232,68.567 -55.296,68.631 -60.757,68.631 -67.64,68.631 -70.053,68.631 -71.501,67.183 ; SW1.C -57.15,89.281 ; v1(-47.498,56.261) -33.528,56.261 -32.448,57.34 -31.877,57.912 v1@-31.771,57.912 ; lcd1.2 -43.561,96.393 -44.704,97.536 -54.356,97.536 -57.15,94.742 -57.15,89.281 ; v1@-36.322,36.576 v1@-36.216,36.576 ; v1(-36.195,36.576) -36.195,41.414 v1(-37.707,42.926) -33.516,47.117 v1(-31.369,47.117) ; L?.3 -16.27,56.642 v1(-14.732,56.642) ; JP?.17 JP?.16 ; JP?.4 JP?.3 JP?.2 ; -71.501,30.353 -71.501,42.926 ; -71.501,42.926 -71.501,55.88 ; -71.501,55.88 -71.501,67.183 ; -71.501,67.183 -71.501,80.391 FAN.2 -69.977,85.653 SW1.2 -68.849,86.726 -66.294,89.281 -57.15,89.281
  other v1: -36.83,35.941 -36.195,35.941 -35.56,35.941 -35.56,35.941 -36.83,36.576 -36.195,36.576 -35.56,36.576 -35.56,36.576 -36.83,37.211 -36.195,37.211 -35.56,37.211 -35.56,37.211 -32.385,57.277 -31.75,57.277 -31.115,57.277 -31.115,57.277 -32.385,57.912 -31.75,57.912 -31.115,57.912 -31.115,57.912 -32.385,58.547 -31.75,58.547 -31.115,58.547 -31.115,58.547
led: JP?.14 R53.1 | length 55.6
  Top Layer w0.508: R53.1 -51.157,20.55 -47.371,16.764 -40.005,16.764 v1(-37.211,19.558)
  Bottom Layer w0.508: v1(-37.211,19.558) -37.211,22.352 -33.528,26.035 JP?.14
MISO: JP?.9 lcd1.9 lcd1.13 | length 79.5
  Top Layer w0.508: lcd1.9 -25.781,96.012 -24.892,96.901 -16.256,96.901 -15.621,96.266 lcd1.13
  Bottom Layer w0.508: lcd1.9 -25.781,93.853 -11.684,79.756 -11.684,44.45 -5.969,38.735 JP?.9
MOSI: JP?.33 lcd1.6 lcd1.12 | length 80.9
  Bottom Layer w0.508: lcd1.6 -33.401,96.266 -32.766,96.901 -18.669,96.901 -18.161,96.393 lcd1.12 -9.906,86.233 -9.906,46.482 -5.969,42.545 -3.556,42.545 -2.286,41.275 JP?.33
NetC11_1: C11.1 U?.1@-37.574,70.216 | length 3.2
  Top Layer w0.889: C11.1 -37.846,68.707 -37.574,68.979 U?.1@-37.574,70.216
NetC27_1: C27.1 C28.1 L1.1 NT5.2 R3.2 U?.5@-37.592,47.144 | length 13.1
  Top Layer w0.508: U?.5@-37.592,47.144 -37.592,48.387 ; L1.1 -37.592,48.617 -37.592,48.387 ; NT5.2 -35.052,49.149 -35.052,48.871 R3.2 -37.362,48.617 -37.592,48.387
  Top Layer w0.889: -35.052,49.149 -33.334,49.149 C27.1 C28.1@-33.331,46.987
NetC31_1: C31.1 R14.1 U?.6@-42.974,72.756 | length 4.7
  Top Layer w0.508: R14.1 C31.1 -45.977,72.756 U?.6@-42.974,72.756
NetC32_1: C32.1 R14.2 | length 2.7
  Top Layer w0.508: C32.1 -47.498,75.311 -47.141,75.668 R14.2
NetD7_1: D7.1 L1.2 U?.1@-38.542,44.804 | length 9.1
  Top Layer w0.508: L1.2 -41.529,50.245 D7.1 -39.934,46.196 U?.1@-38.542,44.804
NetD11_1: D11.1 LS1.2 Q5.3 | length 18.2
  Top Layer w0.508: D11.1 -46.355,23.495 LS1.2 -48.768,20.447 -46.99,18.669 -39.878,18.669 -37.699,20.848 Q5.3
NetJ?_A4: J?.A4 J?.A9
NetJ?_A5: J?.A5 R60.1 | length 2.4
  Bottom Layer w0.305: J?.A5 -27.353,5.89 v1(-27.051,5.588)
NetJ?_B4: J?.B4 J?.B9 | length 1.2
  Bottom Layer w0.203: J?.B4 -31.512,7.89 -31.242,7.62
NetJ?_B5: J?.B5 R61.1 | length 2.5
  Bottom Layer w0.305: v1(-34.417,7.759) -34.417,7.747 -34.544,7.62 -34.314,7.39 J?.B5
NetL5_1: L5.1 R53.2 | length 3.4
  Top Layer w0.508: L5.1 -53.831,19.05 R53.2
NetQ5_1: Q5.1 R50.2 | length 1.9
  Top Layer w0.508: Q5.1 -35.015,21.348 R50.2
NetR1_2: R1.2 U?.4@-37.574,74.026 | length 1.7
  Top Layer w0.508: R1.2@-37.829,75.577 -37.574,75.322 U?.4@-37.574,74.026
NetR3_1: R3.1 U?.4@-36.642,47.144 | length 1.3
  Top Layer w0.508: U?.4@-36.642,47.144 -36.615,47.117 R3.1
NetR11_1: R11.1 R19.2 U?.3@-36.642,44.804 | length 3.5
  Top Layer w0.305: U?.3@-36.642,44.804 -36.207,44.369 R19.2 R11.1
PGND: JP?.40 L?.2 | length 18
  Top Layer w0.508: L?.2 -9.399,64.39 v1(-6.731,61.722)
  Bottom Layer w0.508: v1(-6.731,61.722) -3.302,61.722 -2.007,60.427 JP?.40
POWER: JP?.1 L?.1 | length 21.6
  Top Layer w0.508: L?.1 -11.811,72.39 -4.547,65.126 JP?.1
RESET: JP?.7 lcd1.4 | length 76.3
  Top Layer w0.508: v1(-30.988,90.932) -19.812,79.756 -19.812,45.466 -18.161,43.815 JP?.7
  Bottom Layer w0.508: lcd1.4 -38.481,92.202 -37.211,90.932 v1(-30.988,90.932)
SCK: JP?.32 lcd1.7 lcd1.10 | length 76.8
  Bottom Layer w0.508: lcd1.7 -30.861,95.885 -30.607,96.139 -26.289,96.139 -23.622,96.139 -23.241,95.758 lcd1.10 -10.795,82.042 -10.795,44.704 -6.096,40.005 -3.277,40.005 JP?.32
SW: C11.2 D8.2 L2.1 U?.8 | length 11.4
  Top Layer w0.889: D8.2 -42.695,64.707 L2.1 -42.974,65.112 -42.974,69.136 ; U?.8 -42.974,69.136 ; C11.2 -42.545,68.707 -42.974,69.136
T_CS: JP?.5 lcd1.11 | length 59.7
  Top Layer w0.508: lcd1.11 -18.796,92.583 -18.796,50.546 -17.145,48.895 JP?.5
T_IRQ: JP?.36 lcd1.14 | length 51.3
  Top Layer w0.305: lcd1.14 -13.081,85.09 -0.711,72.72 -0.711,50.19 JP?.36
USB_N: JP?.35 R57.2 | length 58
  Top Layer w0.508: R57.2 -27.051,35.433 v1(-22.987,39.497) ; v1(-17.272,46.863) -16.51,47.625 v1(-6.477,47.625)
  Bottom Layer w0.508: v1(-22.987,39.497) -22.987,41.148 v1(-17.272,46.863) ; v1(-6.477,47.625) -3.277,47.625 JP?.35
USB_P: JP?.6 R55.2 | length 53
  Top Layer w0.508: R55.2 -25.527,35.433 -21.971,38.989 v1(-21.844,38.989) ; v1(-17.145,45.593) -16.383,46.355 JP?.6
  Bottom Layer w0.508: v1(-21.844,38.989) -21.844,40.894 v1(-17.145,45.593)
V_IN: C17.1 C18.1 C19.1 L?.4 R2.2 U?.2@-37.574,71.486 | length 16.1
  Top Layer w0.508: U?.2@-37.574,71.486 -36.434,71.486 -35.998,71.05 C18.1 C18.1@-34.163,71.05 ; R2.2 -34.048,71.165 C18.1@-34.163,71.05 ; L?.4 -25.358,71.05 C19.1 C17.1 C18.1@-34.163,71.05
VCC: AMS?.2 AMS?.4 C?.1@-55.257,81.026 C?.1@-55.257,82.55 lcd1.1 lcd1.8 R25.2 R30.2 R36.2 R37.2 R38.2 R39.2 R41.2 R46.2 | length 131.9
  Top Layer w0.508: v1(-63.524,75.681) -63.512,75.668 R38.2 R25.2 ; v1(-57.245,87.603) -57.377,87.603 -57.404,87.63 -57.277,87.757 -57.277,95.885 -56.134,97.028 -45.212,97.028 ; C?.1@-55.257,82.55 -55.257,81.026 -55.257,79.472 AMS?.4 AMS?.2 ; R39.2 R46.2 -46.228,94.361 lcd1.1 -46.101,96.139 -45.212,97.028 ; lcd1.8 -28.321,96.139 -29.21,97.028 -45.212,97.028
  Bottom Layer w0.508: v1(-63.524,75.681) -56.655,82.55 v1(-55.245,82.55) -57.245,82.55 v1(-57.245,87.603) ; v1@-54.61,78.74 v1@-54.504,78.74
  other v1: -55.118,78.105 -54.483,78.105 -53.848,78.105 -53.848,78.105 -55.118,78.74 -54.483,78.74 -53.848,78.74 -53.848,78.74 -55.118,79.375 -54.483,79.375 -53.848,79.375 -53.848,79.375
pads on no net: J?. J?.A2 J?.A3 J?.A8 J?.A10 J?.A11 J?.B2 J?.B3 J?.B8 J?.B10 J?.B11 JP?.15 JP?.18 JP?.19 JP?.20 JP?.21 JP?.22 JP?.25 JP?.26 JP?.37 SW1.S1 SW1.S2 U?.6@-38.542,47.144

## Polygon pours and split planes (outlines as drawn)
GND on Top Layer "GND_L01_P001" (solid, pour order 1): 0,98.933 -75.565,98.933 -75.565,0 0,0
GND on Bottom Layer "GND_L02_P000" (solid, pour order 0): 0,98.933 -75.565,98.933 -75.565,0 0,0

## Keep-outs
Keep-Out Layer:
  circle w0.254: c-15.621,7.112 r8
  circle w0.254: c-46.076,6.96 r6.352
  circle w0.254: c-62.865,6.96 r6.352
  lines w0.508: -75.616,-0.051 0.025,-0.051 0.025,98.958 -75.616,98.958 -75.616,-0.051

## Text inside footprints (layer, text, board x,y; h text height)
LS1: Top Overlay "+" at -42.558,21.806 h1.52 r180